# EAGLE board Sismin_ATmega328P_fix_v8 (EAGLE 9.7.0)
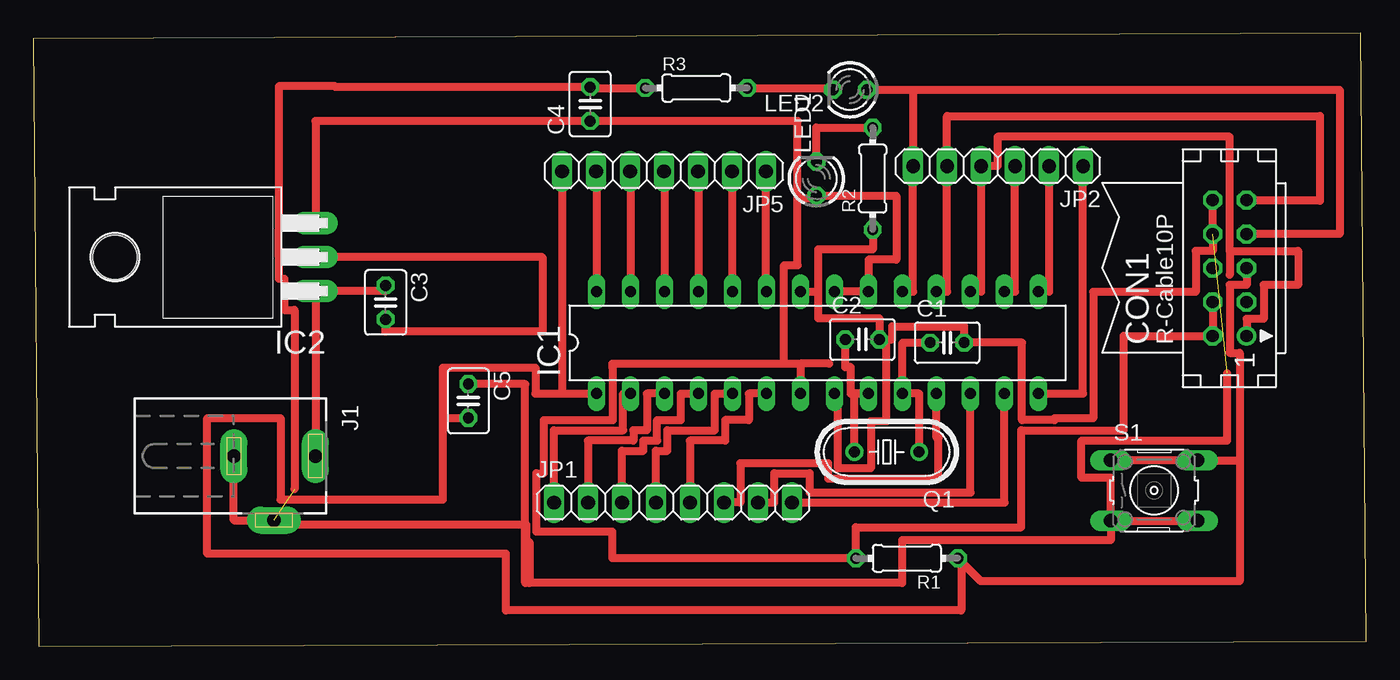
[diagram p0: board, top side]

Size 99.6 x 45.83 mm. Coordinates in mm from the lower left corner, seen from the top.
Outline: 0.38,0 99.6,0.38 99.22,45.83 0,45.45 0.38,0
Copper layers (1*16): Top / Bottom
Stack-up Default Layer Stack: Top User Defined 0.035mm / Dielectric-1 User Defined 1.5mm / Bottom User Defined 0.035mm
Design rules: minimum copper width 6mil, minimum drill size 0.35mm, copper clearance wire_polygon to wire_polygon 6mil, copper clearance wire_polygon to pad_smd 6mil, copper clearance wire_polygon to via 6mil, copper clearance pad_smd to pad_smd 6mil, copper clearance pad_smd to via 6mil, copper clearance via to via 6mil, copper clearance smd to pad (same net) 6mil, copper clearance smd to via (same net) 6mil, copper clearance smd to smd (same net) 6mil, dimension clearance 40mil, restrict clearance 0mil, drill distance 6mil, keepout clearance 0mil

## Footprints (pad centres in the part's own frame; a part is rotated, then mirrored left to right if it is on the bottom)
C025-030X050 = drill 0.813 octagon: 1 -1.27,0; 2 1.27,0
CON10 = drill 0.914: 1 -5.08,-1.27 | drill 0.914 octagon: 2 -5.08,1.27; 3 -2.54,-1.27; 4 -2.54,1.27; 5 0,-1.27; 6 0,1.27; 7 2.54,-1.27; 8 2.54,1.27; 9 5.08,-1.27; 10 5.08,1.27
DIL28-3 = drill 0.813 long: 1 -16.51,-3.81; 2 -13.97,-3.81; 3 -11.43,-3.81; 4 -8.89,-3.81; 5 -6.35,-3.81; 6 -3.81,-3.81; 7 -1.27,-3.81; 8 1.27,-3.81; 9 3.81,-3.81; 10 6.35,-3.81; 11 8.89,-3.81; 12 11.43,-3.81; 13 13.97,-3.81; 14 16.51,-3.81; 15 16.51,3.81; 16 13.97,3.81; 17 11.43,3.81; 18 8.89,3.81; 19 6.35,3.81; 20 3.81,3.81; 21 1.27,3.81; 22 -1.27,3.81; 23 -3.81,3.81; 24 -6.35,3.81; 25 -8.89,3.81; 26 -11.43,3.81; 27 -13.97,3.81; 28 -16.51,3.81
TO220H = drill 1.118 long: 1 -2.54,-10.16; 2 0,-10.16; 3 2.54,-10.16 | hole 3.302: 0,4.826
DCJ0202 = drill 1 pad 2 long: 1 0,3.1; 2 4.8,0; 3 0,-3
1X08 = drill 1.016 long: 1 -8.89,0; 2 -6.35,0; 3 -3.81,0; 4 -1.27,0; 5 1.27,0; 6 3.81,0; 7 6.35,0; 8 8.89,0
1X06 = drill 1.016 long: 1 -6.35,0; 2 -3.81,0; 3 -1.27,0; 4 1.27,0; 5 3.81,0; 6 6.35,0
1X07 = drill 1.016 long: 1 -7.62,0; 2 -5.08,0; 3 -2.54,0; 4 0,0; 5 2.54,0; 6 5.08,0; 7 7.62,0
LED3MM = drill 0.813 octagon: A -1.27,0; K 1.27,0
HC49U-V = drill 0.813: 1 -2.413,0; 2 2.413,0
0204/7 = drill 0.813 octagon: 1 -3.81,0; 2 3.81,0
B3F-10XX = drill 1.016 long: 1 -3.251,2.261; 2 3.251,2.261; 3 -3.251,-2.261; 4 3.251,-2.261

## Placement (x,y rotation side)
C1  [C025-030X050]  68.29,22.71 0 top
C2  [C025-030X050]  61.95,22.95 0 top
C3  [C025-030X050]  26.32,25.72 270 top
C4  [C025-030X050]  41.61,40.55 90 top
C5  [C025-030X050]  32.5,18.35 270 top
CON1  [CON10]  89.4,28.29 90 top
IC1  MEGA8-P  [DIL28-3]  58.6,22.71 0 top
IC2  7805T  [TO220H]  10.92,29.1 90 top
J1  DCJ0202  [DCJ0202]  17.97,14.23 270 top
JP1  PINHD-1X8  [1X08]  47.8,10.75 0 top
JP2  PINHD-1X6  [1X06]  72.1,35.91 180 top
JP5  PINHD-1X7  [1X07]  47.13,35.52 180 top
LED1  [LED3MM]  58.52,34.97 90 top
LED2  [LED3MM]  61.02,41.62 180 top
Q1  [HC49U-V]  63.78,14.54 180 top
R1  [0204/7]  65.28,6.59 180 top
R2  [0204/7]  62.73,34.98 90 top
R3  [0204/7]  49.54,41.75 0 top
S1  [B3F-10XX]  83.76,11.66 0 top

## Library data of the parts
C1-C5 R1-R3 = rcl
CON1 = con-harting; OC_FARNELL: unknown; OC_NEWARK: unknown
IC1 = atmel; OC_FARNELL: unknown; OC_NEWARK: unknown
IC2 = linear
J1 = con-jack; OC_FARNELL: unknown; OC_NEWARK: unknown
JP1 = Connector; CATEGORY: Headers; DESCRIPTION: Header, Straight, 8 Position; MANUFACTURER: Generic; MPN: Generic; OPERATING_TEMPERATURE: Generic; PART_STATUS: Active; PITCH: 0.100" (2.54mm); ROHS_COMPLIANCE: Generic; SERIES: Generic; SUB-CATEGORY: Headers, Male Pins; TYPE: Board to Board or Cable, Unshrouded, Through Hole, Straight
JP2 = Connector; CATEGORY: Headers; DESCRIPTION: Header, Straight, 6 Position; MANUFACTURER: Generic; MPN: Generic; OPERATING_TEMPERATURE: Generic; PART_STATUS: Active; PITCH: 0.100" (2.54mm); ROHS_COMPLIANCE: Generic; SERIES: Generic; SUB-CATEGORY: Headers, Male Pins; TYPE: Board to Board or Cable, Unshrouded, Through Hole, Straight
JP5 = Connector; CATEGORY: Headers; DESCRIPTION: Header, Straight, 7 Position; MANUFACTURER: Generic; MPN: Generic; OPERATING_TEMPERATURE: Generic; PART_STATUS: Active; PITCH: 0.100" (2.54mm); ROHS_COMPLIANCE: Generic; SERIES: Generic; SUB-CATEGORY: Headers, Male Pins; TYPE: Board to Board or Cable, Unshrouded, Through Hole, Straight
LED1 LED2 = led
Q1 = crystal; OC_FARNELL: 1666969; OC_NEWARK: unknown
S1 = switch-omron; MPN: B3F-1000; OC_FARNELL: 176432; OC_NEWARK: 36M3542

## Nets
GND: C1.2 C2.2 C3.2 C4.2 C5.1 CON1.8 CON1.10 IC1.8 IC1.22 IC2.2 J1.2 J1.3 R2.1 R3.1 S1.3 S1.4
N$1: C3.1 IC2.1 J1.1
N$2: C4.1 CON1.2 CON1.4 IC1.7 IC1.20 IC1.21 IC2.3 LED1.A R1.2
N$3: LED1.K R2.2
N$4: LED2.K R3.2
N$5: IC1.23 JP5.1
N$6: IC1.24 JP5.2
N$7: IC1.25 JP5.3
N$8: IC1.26 JP5.4
N$9: IC1.27 JP5.5
N$10: IC1.28 JP5.6
N$11: IC1.2 JP1.1
N$12: CON1.1 IC1.17 JP2.4
N$13: CON1.9 IC1.18 JP2.5
N$14: IC1.3 JP1.2
N$15: IC1.4 JP1.3
N$16: IC1.5 JP1.4
N$17: IC1.6 JP1.5
N$18: IC1.11 JP1.6
N$19: IC1.12 JP1.7
N$20: IC1.13 JP1.8
N$21: C2.1 IC1.9 Q1.2
N$22: C1.1 IC1.10 Q1.1
N$23: C5.2 CON1.5 IC1.1 JP5.7 R1.1 S1.1 S1.2
N$24: IC1.14 JP2.1
N$26: IC1.15 JP2.2
N$27: IC1.16 JP2.3
N$28: CON1.7 IC1.19 JP2.6 LED2.A

## Tracks (layer width: path | path; a pad name or v marks a point on that pad's centre or on a via)
GND  (2 unrouted)
  Top 0.61: J1.3 14.97,9.43 J1.2 18.28,9.12 36.83,9.12 36.83,7.8 37.07,7.8 37.07,4.74 | R3.1 41.61,41.75 C4.2 22.58,41.82 22.58,41.87 18.33,41.87 18.33,31.17 18.33,29.1 | IC2.2 38.05,29.1 38.05,23.53 26.32,23.53 C3.2 | IC1.8 60.15,18.9 60.15,13.32 62.59,13.32 62.59,16.83 63.76,16.83 63.76,16.92 63.73,16.92 63.73,22.95 C2.2 | C2.2 64.19,22.95 64.19,23.93 69.56,23.93 C1.2 73.89,22.71 73.89,16.92 76.33,16.92 76.33,17.05 79.22,17.05 79.22,26.51 86.86,26.51 86.86,29.56 88.13,29.56 CON1.8 CON1.10 | R2.1 62.73,29.67 58.65,29.67 58.65,26.52 | IC1.22 58.65,26.52 | 58.65,26.52 58.65,24.54 63.22,24.54 C2.2 | S1.3 S1.4 | S1.3 80.51,7.93 64.92,7.93 64.92,4.74 37.07,4.74 | 37.07,4.74 36.76,4.74 36.76,19.62 C5.1 | 19.51,11.75 19.51,25.17 18.74,25.17 18.74,27.49 18.33,27.49 18.33,29.1 | S1.3 80.51,12.6 78.32,12.6 78.32,15.39 89.22,15.39 89.22,20.44 | 18.74,29.1 IC2.2 | IC2.2 18.33,29.1
N$1
  Top 0.61: C3.1 26.32,26.56 IC2.1 21.08,14.24 J1.1
N$2
  Top 0.61: IC2.3 21.08,39.28 C4.1 57.12,39.28 57.12,33.51 | 57.12,33.51 58.52,33.51 LED1.A 64.5,33.7 64.5,28.91 62.41,28.91 IC1.20 IC1.21 | 56.11,21.14 43.27,21.14 43.27,20.88 43.31,20.88 43.31,16.92 38.15,16.92 38.15,12.93 37.59,12.93 37.59,8.57 43.27,8.57 43.27,6.59 R1.2 61.47,8.91 73.83,8.91 73.83,16.15 81.48,16.15 81.48,23.21 CON1.2 CON1.4 | 56.11,21.14 57.33,21.14 | 57.33,21.14 IC1.7 | 59.46,21.14 57.33,21.14 | 57.12,33.51 57.12,28.5 56.11,28.5 56.11,21.14
N$3
  Top 0.61: LED1.K 58.52,38.79 R2.2
N$4
  Top 0.61: R3.2 59.75,41.75 LED2.K
N$5
  Top 0.61: IC1.23 54.75,26.52 JP5.1
N$6
  Top 0.61: IC1.24 52.25,35.52 JP5.2
N$7
  Top 0.61: IC1.25 49.71,35.52 JP5.3
N$8
  Top 0.61: IC1.26 47.17,35.52 JP5.4
N$9
  Top 0.61: IC1.27 44.63,35.52 JP5.5
N$10
  Top 0.61: IC1.28 42.09,35.52 JP5.6
N$11
  Top 0.61: IC1.2 44.07,18.9 44.07,16.16 38.91,16.16 JP1.1
N$12
  Top 0.61: IC1.17 70.83,26.52 JP2.4 72.05,35.91 72.05,38.09 89.4,38.09 89.4,29.56 | 89.4,29.56 94.52,29.56 94.52,27.02 91.94,27.02 91.94,24.48 90.67,24.48 CON1.1 | 89.4,29.56 89.4,27.78
N$13
  Top 0.61: IC1.18 68.29,26.52 JP2.5 68.29,39.65 96.16,39.65 96.16,33.37 | 90.67,33.31 CON1.9 96.16,33.37 | 96.16,33.37 96.16,33.31
N$14
  Top 0.61: IC1.3 45.85,18.9 45.85,16.16 44.83,16.16 44.83,15.4 41.45,15.4 JP1.2
N$15
  Top 0.61: IC1.4 48.39,18.9 48.39,16.92 46.61,16.92 46.61,15.4 45.59,15.4 45.59,14.63 43.99,14.63 JP1.3
N$16
  Top 0.61: JP1.4 46.53,14.63 47.37,14.63 47.37,16.16 50.93,16.16 50.93,18.9 IC1.5
N$17
  Top 0.61: JP1.5 49.07,15.4 51.69,15.4 51.69,16.92 53.47,16.92 53.47,18.9 IC1.6
N$18
  Top 0.61: JP1.6 52.83,10.75 52.83,13.7 59.39,13.7 59.39,12.56 67.65,12.56 67.65,15.62 67.49,15.62 IC1.11
N$19
  Top 0.61: JP1.7 55.37,10.75 55.37,12.93 58.01,12.93 58.01,11.51 70.03,11.51 IC1.12
N$20
  Top 0.61: JP1.8 72.57,10.75 IC1.13
N$21
  Top 0.61: C2.1 60.68,20.88 61.09,20.88 61.09,18.9 IC1.9 61.37,18.9 Q1.2
N$22
  Top 0.61: C1.1 64.95,22.71 IC1.10 66.19,18.9 Q1.1
N$23
  Top 0.61: JP5.7 39.51,18.9 | 39.51,18.9 IC1.1 | S1.1 S1.2 90.16,13.92 | 37.52,18.88 37.52,18.9 | 37.52,18.9 39.51,18.9 | 37.52,18.9 37.52,20.84 30.61,20.84 30.61,16.96 | 30.61,16.96 30.61,10.99 18.47,10.99 18.47,17.07 13,17.07 13,6.92 35.31,6.92 35.31,2.69 69.35,2.69 69.35,6.59 R1.1 70.78,4.9 90.16,4.9 90.16,13.92 | CON1.5 90.67,27.02 89.4,27.02 89.4,21.94 90.16,21.94 90.16,13.92 | 30.61,16.96 30.73,17.08 C5.2
N$24
  Top 0.61: IC1.14 78.45,18.9 JP2.1
N$26
  Top 0.61: IC1.15 75.91,26.52 JP2.2
N$27
  Top 0.61: IC1.16 73.37,26.52 JP2.3
N$28
  Top 0.61: LED2.A 65.75,41.62 | IC1.19 65.75,26.52 JP2.6 65.75,41.62 | 65.75,41.62 97.63,41.62 97.63,30.83 CON1.7